# Altium PCB praline.PcbDoc (part 5 of 8)
Units mm, origin at the board's own origin, x right, y up, seen from the top; angles counter-clockwise.
Board outline 152.4 x 101.6 mm, 6 copper layers (In2.Cu, F.Cu, B.Cu, In1.Cu, In3.Cu, In4.Cu); 581 components, 490 nets, 2812 pads, 953 vias.
Unrouted connection lines stored in the file: 404.
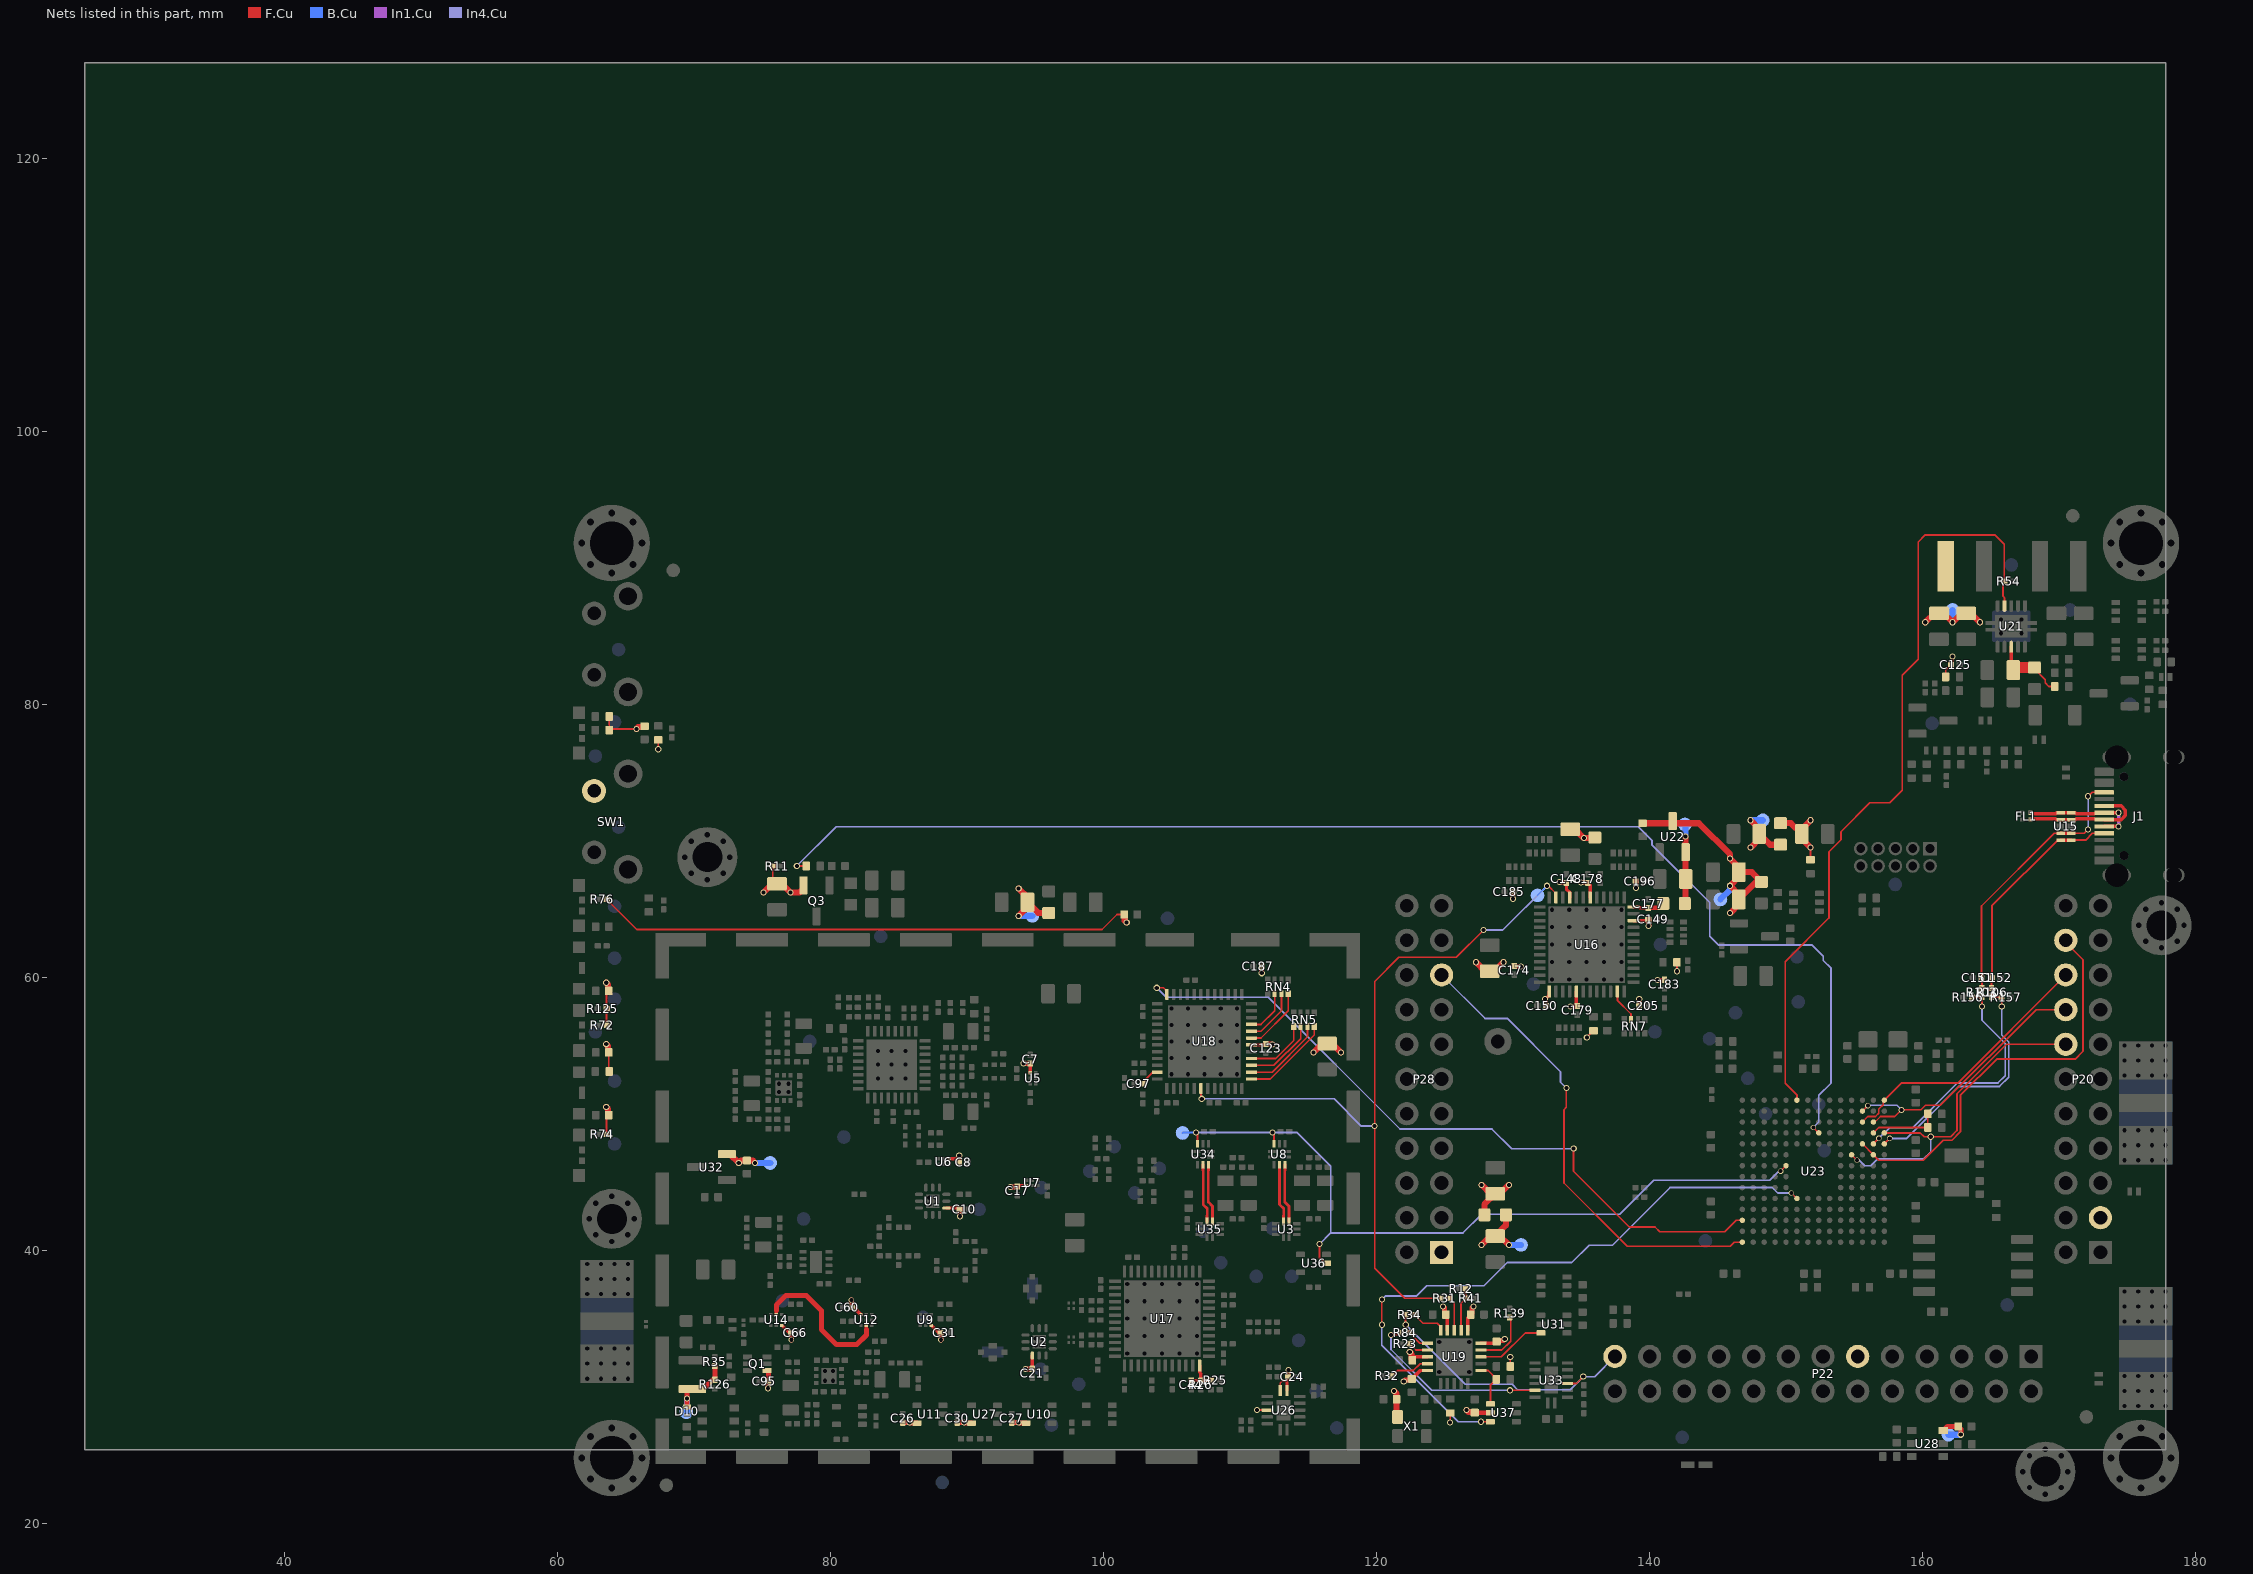
[diagram p7: the nets of this part, all layers, seen from the top]

## Via types
v1: diameter 0.45, hole 0.3, F.Cu to B.Cu, tented both sides, 751 vias
v2: diameter 0.4, hole 0.3, F.Cu to B.Cu, tented both sides, 119 vias
v3: diameter 0.7, hole 0.4, F.Cu to B.Cu, tented both sides, 83 vias

## Nets (pads, with @x,y where several pads share a name; then routed paths per layer and width w, separated by ;. In a path a pad name is that pad's centre, name@x,y a point inside that pad or via, vN(x,y) a via of type N, cw(c..) or ccw(c..) an arc to the next point about the centre after c; other vN are vias at no path point) (continued)
!VAA_ENABLE: (continued)
  In4.Cu w0.127: v1(77.55,68.17) 80.43,71.05 139.19,71.05 140.18,70.06 140.18,69.73 144.41,65.5 144.41,63.02 145.04,62.39 151.88,62.39 152.72,61.55 152.72,61.25 153.3,60.67 153.3,52.28 152.4,51.38 152.4,49.42 v2(152,49.02)
+1V2: C125.1 C126.1 C127.1 C172.1 FB7.1 L10.2 R47.1 R53.1 TP18.1 | length 13.1
  F.Cu w0.127: R53.1@151.8,68.63 v1(151.8,69.52) ; R47.1@161.69,82.02 161.69,82.53 C125.1@162.08,82.92 162.2,83.04 v1(162.2,83.52)
  F.Cu w0.45: FB7.1@149.6,71.307 150.363,71.308 C172.1@151.15,70.52 ; v1(151.8,69.52) 151.15,70.17 C172.1@151.15,70.52 ; v1(151.8,71.52) 151.15,70.87 C172.1@151.15,70.52 ; v1(160.2,86.02) 160.916,86.736 161.2,86.736 161.484,86.736 v1(162.2,86.02) 162.916,86.736 163.2,86.736 163.484,86.736 v1(164.2,86.02)
  B.Cu w0.45: v1(162.2,86.02) TP18.1@162.2,86.92
+2V5: C175.1 FB8.1 TP1.1 U22.2 | length 5.8
  F.Cu w0.45: FB8.1@142.587,65.42 142.65,65.483 C175.1@142.65,67.22 U22.2@142.65,69.182 v1(142.65,70.32)
  B.Cu w0.45: TP1.1@142.6,71.22 142.65,71.17 v1(142.65,70.32)
+5V: C147.1 FB1.1 R52.1 U21.3 | length 5.7
  F.Cu w0.127: FB1.1@168.2,82.707 168.2,82.6 168.98,81.82 168.98,81.59 169.25,81.32 R52.1@169.69,81.32
  F.Cu w0.25: U21.3@166.5,84.22 166.5,82.67 C147.1@166.65,82.52
  F.Cu w0.8: C147.1@166.65,82.52 166.837,82.708 FB1.1@168.2,82.707
AA_BYPASS_I+: U34.4 U35.7 | length 4.3
  F.Cu w0.203: U34.4@107.3,46.301 107.3,45.879 107.311,45.868 107.311,43.392 107.611,43.092 107.611,42.572 107.6,42.561 U35.7@107.6,42.139
AA_BYPASS_I-: U34.5 U35.6 | length 4.3
  F.Cu w0.203: U34.5@107.7,46.301 107.7,45.879 107.689,45.868 107.689,43.548 107.989,43.248 107.989,42.572 108,42.561 U35.6@108,42.139
AA_BYPASS_Q+: U3.6 U8.5 | length 4.3
  F.Cu w0.203: U8.5@113.3,46.301 113.3,45.879 113.289,45.868 113.289,43.548 113.589,43.248 113.589,42.572 113.6,42.561 U3.6@113.6,42.139
AA_BYPASS_Q-: U3.7 U8.4 | length 4.3
  F.Cu w0.203: U8.4@112.9,46.301 112.9,45.879 112.911,45.868 112.911,43.392 113.211,43.092 113.211,42.572 113.2,42.561 U3.7@113.2,42.139
AA_EN: TP55.1 U8.10 U23.K7 U34.10 U36.2 | length 56.8
  F.Cu w0.127: v1(106.79,48.66) 106.9,48.55 U34.10@106.9,47.838 ; v1(112.39,48.66) 112.5,48.55 U8.10@112.5,47.838 ; v1(115.83,40.48) 115.83,39.46 116.22,39.07 U36.2@116.35,39.07 ; v2(149.6,45.82) U23.K7@150,46.22
  In4.Cu w0.127: v1(106.79,48.66) v1(112.39,48.66) 114.16,48.66 116.65,46.17 116.65,41.3 ; v1(115.83,40.48) 116.65,41.3 ; v2(149.6,45.82) 149.46,45.82 148.8,45.16 140.3,45.16 137.81,42.67 127.71,42.67 126.34,41.3 116.65,41.3
  B.Cu w0.127: TP55.1@105.8,48.62 105.84,48.66 v1(106.79,48.66)
ADC0_0: P20.20 U23.B6 U23.C5 | length 30.2
  F.Cu w0.127: U23.C5@155.6,47.82 U23.B6@156.4,47.02 156.8,46.62 160.056,46.62 161.516,48.08 162.155,48.08 162.774,48.699 162.774,51.374 165.43,54.03 171.18,54.03 171.75,54.6 171.75,61.31 170.49,62.57 P20.20@170.49,62.73
ADC0_2: P20.16 U23.B3 U23.C2 | length 20.7
  F.Cu w0.127: U23.C2@155.6,50.22 v2(156,50.62) ; U23.B3@156.4,49.42 156.52,49.42 156.92,49.82 157.97,49.82 v1(158.46,50.31) 159.89,50.31 160.22,50.64 161.31,50.64 168.32,57.65 P20.16@170.49,57.65
  In4.Cu w0.127: v2(156,50.62) 156.02,50.64 158.13,50.64 v1(158.46,50.31)
ADC0_3: R38.2 R39.1 U23.B4 | length 5.2
  F.Cu w0.127: U23.B4@156.4,48.62 156.8,49.02 R39.1@160.39,49.02 R38.2@160.39,50.02
ADC0_4: R106.1 R157.1 U23.A5 | length 18
  F.Cu w0.127: U23.A5@157.2,47.82 v2(157.6,48.22) ; R106.1@165.05,58.6 165.08,58.57 R157.1@165.78,58.57 165.8,58.55 v1(165.8,57.87)
  In4.Cu w0.127: v2(157.6,48.22) 158.85,48.22 162.65,52.02 165.63,52.02 166.31,52.7 166.31,55.28 165.8,55.79 v1(165.8,57.87)
ADC0_5: P20.18 U23.A1 U23.C3 | length 19.7
  F.Cu w0.127: U23.C3@155.6,49.42 156,49.82 156.552,49.82 156.8,50.068 156.8,50.372 157.12,50.692 157.12,50.94 U23.A1@157.2,51.02 158.45,52.27 162.57,52.27 P20.18@170.49,60.19
ADC0_6: P20.14 U23.A4 U23.D6 | length 25.4
  F.Cu w0.127: U23.D6@154.8,47.02 v2(155.2,46.62) ; U23.A4@157.2,48.62 159.835,48.62 160.115,48.34 v1(160.6,48.34) 162.056,48.34 162.52,48.804 162.52,51.48 166.15,55.11 P20.14@170.49,55.11
  In4.Cu w0.127: v2(155.2,46.62) 155.36,46.62 155.76,46.22 156.21,46.22 156.71,46.72 160.1,46.72 160.6,47.22 v1(160.6,48.34)
ADC0_7: R103.1 R156.1 U23.B5 | length 19
  F.Cu w0.127: U23.B5@156.4,47.82 v2(156.8,48.22) ; R156.1@163.62,58.57 164.32,58.57 R103.1@164.35,58.6 v1(164.35,57.87)
  In4.Cu w0.127: v2(156.8,48.22) 157.59,49.01 159.28,49.01 162.55,52.28 165.52,52.28 166.05,52.81 166.05,54.4 166.05,55.17 164.35,56.87 v1(164.35,57.87)
AFE_CLK: R31.1 TP29.1 U16.35 U18.6 | length 58.7
  F.Cu w0.127: U18.6@107.15,51.87 107.15,51.18 v1(107.21,51.12) ; R31.1@124.68,36.52 122.07,36.52 119.87,38.72 v1(119.87,49.12) 119.87,59.71 121.64,61.48 125.85,61.48 v1(127.85,63.48) ; v1(132.5,66.72) 132.59,66.72 133.15,66.16 U16.35@133.15,65.857
  In4.Cu w0.127: v1(107.21,51.12) 116.9,51.12 118.9,49.12 v1(119.87,49.12) ; v1(127.85,63.48) 129.26,63.48 v1(132.5,66.72)
  B.Cu w0.127: TP29.1@131.8,66.02 v1(132.5,66.72)
AMP_BYPASS: U12.2 U14.2 | length 10.9
  F.Cu w0.25: U14.2@76.05,35.32 76.05,35.62 ; 82.65,34.22 U12.2@82.65,34.52
  F.Cu w0.364: 76.05,35.62 76.05,36.02 76.75,36.72 78.25,36.72 79.35,35.62 79.35,34.22 80.45,33.12 81.95,33.12 82.65,33.82 82.65,34.22
AUX_CLK1: R84.1 U33.14 | length 13.6
  F.Cu w0.127: v1(121.07,33.83) 121.09,33.85 121.66,33.85 R84.1@121.78,33.97 ; v1(129.79,29.77) U33.14@131.613,29.77
  In4.Cu w0.127: v1(121.07,33.83) 121.07,32.76 124.06,29.77 v1(129.79,29.77)
AUX_CLK2: P22.25 R34.1 U33.4 | length 20.4
  F.Cu w0.127: R34.1@122.13,35.32 122.13,34.59 v1(122.15,34.57) ; U33.4@133.988,30.27 134.65,30.27 v1(135.15,30.77)
  In4.Cu w0.127: v1(122.15,34.57) 126.51,30.21 129.94,30.21 130.33,29.82 134.2,29.82 v1(135.15,30.77) 135.99,30.77 P22.25@137.47,32.25
BIAS: D10.1 L19.1 R35.1 R126.2 TP47.1 | length 5.1
  F.Cu w0.35: D10.1@69.5,28.545 v1(69.5,29.16)
  F.Cu w0.364: v1(69.5,29.16) L19.1@69.5,29.8 ; L19.1@69.9,29.87 70.709,29.87 71.379,30.54 R126.2@71.55,30.54 R35.1@71.55,31.55
  B.Cu w0.45: TP47.1@69.5,28.22 v1(69.5,29.16)
CAPTURE_EN: RN7.3 U16.11 | length 2.5
  F.Cu w0.127: U16.11@137.65,58.983 137.65,58.33 138.65,57.33 RN7.3@138.65,56.92
CC1: C152.1 J1.A5 R106.2 U15.1 U15.10 | length 16.5
  F.Cu w0.127: R106.2@165.05,59.24 165.05,59.94 C152.1@165.08,59.97 165.08,65.25 169.9,70.07 U15.10@170.112,70.07 ; U15.1@170.887,70.07 171.94,70.07 172.44,70.57 J1.A5@173.305,70.57
  F.Cu w0.25: U15.10@170.112,70.07 U15.1@170.887,70.07
CC2: C151.1 J1.B5 R103.2 U15.2 U15.9 | length 19.9
  F.Cu w0.127: R103.2@164.35,59.24 164.35,59.94 C151.1@164.32,59.97 164.32,65.24 169.65,70.57 U15.9@170.112,70.57 ; U15.2@170.887,70.57 171.85,70.57 v1(172.13,70.85) ; v1(172.13,73.28) 172.42,73.57 J1.B5@173.305,73.57
  F.Cu w0.25: U15.9@170.112,70.57 U15.2@170.887,70.57
  In4.Cu w0.127: v1(172.13,70.85) v1(172.13,73.28)
CLK0: R31.2 U19.13 | length 2.5
  F.Cu w0.127: R31.2@125.32,36.52 125.7,36.14 U19.13@125.7,34.17
CLK1: R12.2 R41.2 U19.12 | length 3.2
  F.Cu w0.127: U19.12@126.2,34.17 126.2,36.14 R41.2@126.58,36.52 126.52,36.58 R12.2@126.52,37.22
CLK2: R139.2 U19.9 | length 4.2
  F.Cu w0.127: U19.9@127.65,32.72 129.18,32.72 129.83,33.37 129.83,35.02 R139.2@129.75,35.1
CLK3: U19.8 U31.3 | length 5.1
  F.Cu w0.127: U19.8@127.65,32.22 129.15,32.22 130.9,33.97 U31.3@132.05,33.97
CLK4: R32.2 U19.19 | length 3
  F.Cu w0.127: R32.2@121.12,30.82 121.52,31.22 122.7,31.22 123.2,31.72 U19.19@123.75,31.72
CLK5: R23.2 U19.17 | length 1.5
  F.Cu w0.127: R23.2@122.42,33.17 122.45,33.17 122.9,32.72 U19.17@123.75,32.72
CLK6: R84.2 U19.16 | length 1.6
  F.Cu w0.127: R84.2@122.42,33.97 123.17,33.22 U19.16@123.75,33.22
CLK7: R34.2 U19.15 | length 2.6
  F.Cu w0.127: R34.2@122.77,35.32 123.41,34.68 124.45,34.68 124.7,34.43 U19.15@124.7,34.17
CLKIN: R85.2 U19.6 U37.4 | length 3.4
  F.Cu w0.127: U19.6@127.65,31.22 128.2,31.22 128.79,30.63 R85.2@128.79,30.57 128.35,30.13 U37.4@128.35,28.77
CLKIN_CTRL: U23.J10 U37.6 | length 47.7
  F.Cu w0.127: v1(120.4,34.57) v1(120.4,36.42) ; v1(127.65,27.47) U37.6@128.35,27.47 ; v2(150.4,44.22) U23.J10@150.8,43.82
  In4.Cu w0.127: v1(120.4,34.57) 120.4,33.07 126,27.47 v1(127.65,27.47) ; v1(120.4,36.42) 120.65,36.67 122.932,36.67 123.692,37.43 127.88,37.43 129.584,39.134 134.314,39.134 135.584,40.404 137.294,40.404 141.51,44.62 148.99,44.62 149.39,44.22 v2(150.4,44.22)
COM: C97.1 U18.47 | length 1.5
  F.Cu w0.127: C97.1@102.92,52.21 103.07,52.36 103.07,52.52 103.62,53.07 U18.47@103.95,53.07
CPLD_TCK: P28.17 U23.P14 | length 35.1
  F.Cu w0.127: v1(133.91,51.91) 133.91,50.49 133.74,50.32 133.74,44.949 138.359,40.33 145.91,40.33 146.2,40.62 U23.P14@146.8,40.62
  In4.Cu w0.127: P28.17@124.77,60.19 127.95,57.01 129.581,57.01 133.48,53.111 133.48,52.34 v1(133.91,51.91)
CPOUT: C44.2 R25.2 R26.2 U17.24 | length 2.6
  F.Cu w0.25: C44.2@106.45,30.49 R26.2@107.15,30.49 ; U17.24@107.05,31.582 107.05,31.08 107.15,30.98 R26.2@107.15,30.49 ; R25.2@107.88,30.52 107.18,30.52 R26.2@107.15,30.49
CS_AD: U18.36 U23.P12 | length 52.7
  F.Cu w0.127: v1(103.91,59.25) 104.41,59.25 104.65,59.01 U18.36@104.65,58.77 ; v1(134.45,47.47) 134.44,47.46 134.44,45.809 138.519,41.73 140.4,41.73 140.75,41.38 145.52,41.38 146.36,42.22 U23.P12@146.8,42.22
  In4.Cu w0.127: v1(103.91,59.25) 104.6,58.56 112.08,58.56 121.73,48.91 128.46,48.91 129.9,47.47 v1(134.45,47.47)
D+: FL1.4 J1.A6 J1.B6 U15.4 U15.7 | length 8.3
  F.Cu w0.25: 168.05,71.632 169.738,71.632 169.8,71.57 U15.7@170.112,71.57 U15.4@170.887,71.57 171.2,71.57 171.261,71.632 J1.A6@172.58,71.632 ; J1.A6@173.305,71.57 174.54,71.57 174.84,71.87 174.84,72.27 174.54,72.57 J1.B6@173.305,72.57
D-: FL1.2 J1.A7 J1.B7 U15.5 U15.6 | length 7.7
  F.Cu w0.25: 168.05,72.008 169.748,72.008 169.81,72.07 U15.6@170.112,72.07 U15.5@170.887,72.07 171.2,72.07 171.261,72.008 J1.A7@172.58,72.008 ; J1.B7@173.305,71.07 v1(174.36,71.07) ; J1.A7@173.305,72.07 v1(174.36,72.07)
  In1.Cu w0.25: v1(174.36,71.07) v1(174.36,72.07)
DA0: RN5.8 U18.13 | length 6.6
  F.Cu w0.127: U18.13@110.85,52.57 112.23,52.57 115.45,55.79 RN5.8@115.45,56.42
DA1: RN5.7 U18.14 | length 5.9
  F.Cu w0.127: U18.14@110.85,53.07 112.36,53.07 114.95,55.66 RN5.7@114.95,56.42
DA2: RN5.6 U18.15 | length 5.3
  F.Cu w0.127: U18.15@110.85,53.57 112.49,53.57 114.45,55.53 RN5.6@114.45,56.42
DA3: RN5.5 U18.16 | length 4.7
  F.Cu w0.127: U18.16@110.85,54.07 112.63,54.07 113.95,55.39 RN5.5@113.95,56.42
DA4: RN4.8 U18.19 | length 4.8
  F.Cu w0.127: U18.19@110.85,55.57 111.55,55.57 113.55,57.57 RN4.8@113.55,58.82
DA5: RN4.7 U18.20 | length 4.1
  F.Cu w0.127: U18.20@110.85,56.07 111.55,56.07 113.05,57.57 RN4.7@113.05,58.82
DA6: RN4.6 U18.21 | length 3.4
  F.Cu w0.127: U18.21@110.85,56.57 111.55,56.57 112.55,57.57 RN4.6@112.55,58.82